# EAGLE board pidcontroller-less-pins-no-contrast (EAGLE 6.4)
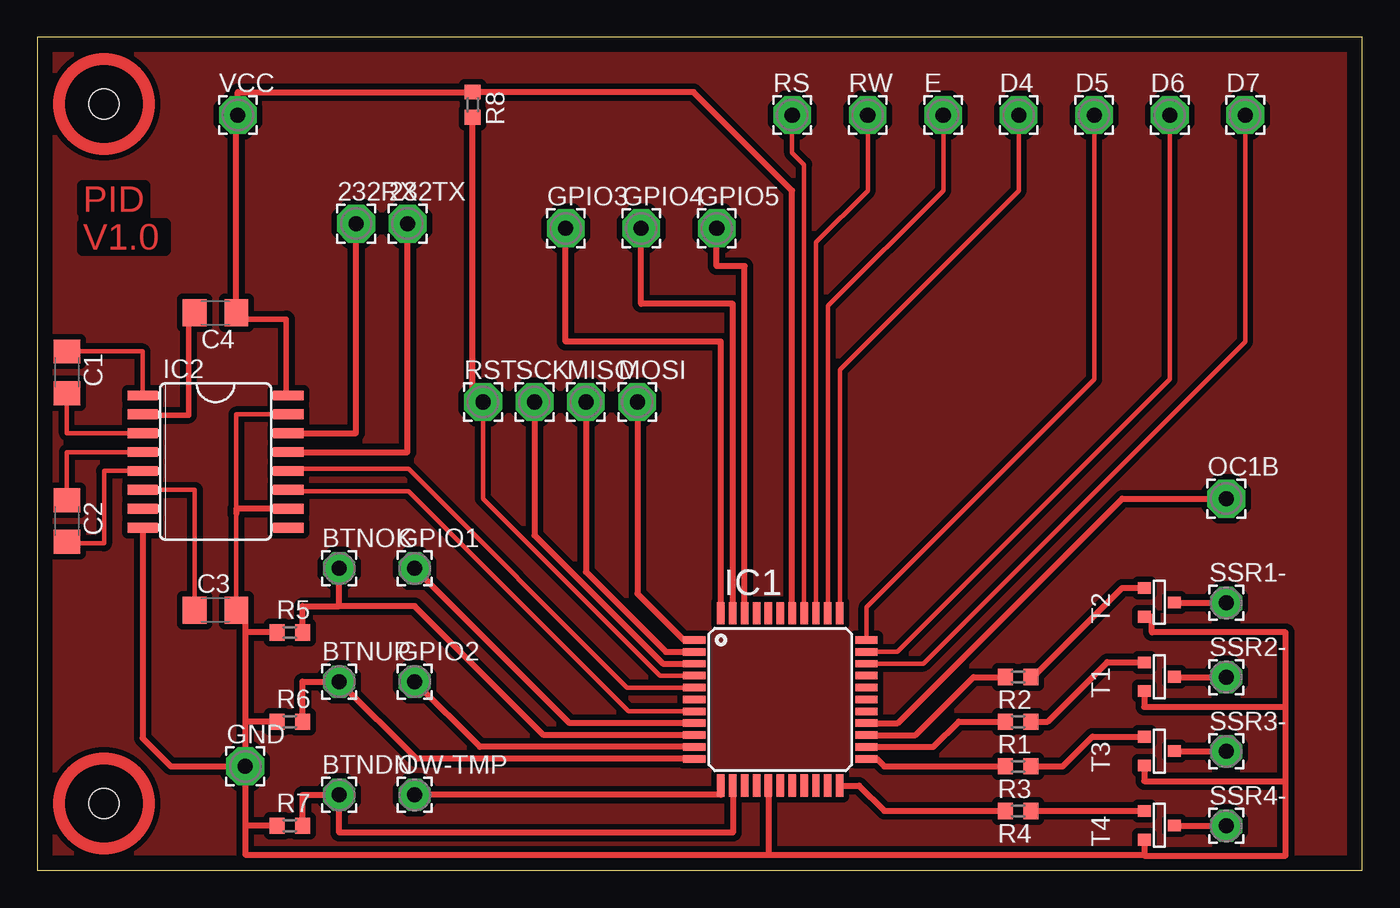
[diagram p0: board, top side]

Size 89.16 x 56.04 mm. Coordinates in mm from the lower left corner, seen from the top.
Outline: 0,0 89.16,0 89.16,56.04 0,56.04 0,0
Copper layers (1*16): Top 0.035mm / dielectric 1.5mm / Bottom 0.035mm
Design rules "default": minimum track width 10mil, minimum drill 24mil, track to track 8mil, track to pad 8mil, pad to pad 8mil, via to via 8mil, smd to smd 8mil, copper to edge 40mil, drill to drill 8mil, minimum pad ring 10mil, minimum via ring 8mil, stop-mask expansion 4mil, vias tented up to drill 0mil, thermal gap 10mil
Net classes: 0 default: width 0.381 mm, drill 0.762 mm, clearance 0.381 mm
Holes 2 mm at 4.5,4.5 4.5,51.54

## Footprints (pad centres in the part's own frame; a part is rotated, then mirrored left to right if it is on the bottom)
2,54/1,0 = drill 1.016 pad 2.54 octagon: 1 0,0
2,15/1,0 = drill 1.016 pad 2.159 octagon: 1 0,0
C1206 = smd 1.6 x 1.8: 1 -1.4,0; 2 1.4,0
TQFP44 = smd 1.5 x 0.5: 1 -5.8,4; 2 -5.8,3.2; 3 -5.8,2.4; 4 -5.8,1.6; 5 -5.8,0.8; 6 -5.8,0; 7 -5.8,-0.8; 8 -5.8,-1.6; 9 -5.8,-2.4; 10 -5.8,-3.2; 11 -5.8,-4; 23 5.8,-4; 24 5.8,-3.2; 25 5.8,-2.4; 26 5.8,-1.6; 27 5.8,-0.8; 28 5.8,0; 29 5.8,0.8; 30 5.8,1.6; 31 5.8,2.4; 32 5.8,3.2; 33 5.8,4 | smd 0.5 x 1.5: 12 -4,-5.8; 13 -3.2,-5.8; 14 -2.4,-5.8; 15 -1.6,-5.8; 16 -0.8,-5.8; 17 0,-5.8; 18 0.8,-5.8; 19 1.6,-5.8; 20 2.4,-5.8; 21 3.2,-5.8; 22 4,-5.8; 34 4,5.8; 35 3.2,5.8; 36 2.4,5.8; 37 1.6,5.8; 38 0.8,5.8; 39 0,5.8; 40 -0.8,5.8; 41 -1.6,5.8; 42 -2.4,5.8; 43 -3.2,5.8; 44 -4,5.8
SO16L = smd 0.66 x 2.032: 1 -4.445,-4.902; 2 -3.175,-4.902; 3 -1.905,-4.902; 4 -0.635,-4.902; 5 0.635,-4.902; 6 1.905,-4.902; 7 3.175,-4.902; 8 4.445,-4.902; 9 4.445,4.902; 10 3.175,4.902; 11 1.905,4.902; 12 0.635,4.902; 13 -0.635,4.902; 14 -1.905,4.902; 15 -3.175,4.902; 16 -4.445,4.902
R0603 = smd 1 x 1.1: 1 -0.85,0; 2 0.85,0
SOT-23 = smd 0.787 x 0.889: 1 0.025,-1.016; 2 -0.94,1.016; 3 0.991,1.016

## Placement (x,y rotation side)
232RX  [2,54/1,0]  21.46,43.5 0 top
232TX  [2,54/1,0]  24.92,43.5 0 top
BTNDN  [2,15/1,0]  20.32,5.08 0 top
BTNOK  [2,15/1,0]  20.32,20.32 0 top
BTNUP  [2,15/1,0]  20.32,12.7 0 top
C1  [C1206]  2,33.5 270 top
C2  [C1206]  2,23.5 270 top
C3  [C1206]  12,17.5 0 top
C4  [C1206]  12,37.5 180 top
D4  [2,54/1,0]  66.04,50.8 0 top
D5  [2,54/1,0]  71.12,50.8 0 top
D6  [2,54/1,0]  76.2,50.8 0 top
D7  [2,54/1,0]  81.28,50.8 0 top
E  [2,54/1,0]  60.96,50.8 0 top
GND  [2,54/1,0]  14,7 0 top
GPIO1  [2,15/1,0]  25.4,20.32 0 top
GPIO2  [2,15/1,0]  25.4,12.7 0 top
GPIO3  [2,54/1,0]  35.56,43.18 0 top
GPIO4  [2,54/1,0]  40.64,43.18 0 top
GPIO5  [2,54/1,0]  45.72,43.18 0 top
IC1  MEGA8515-A  [TQFP44]  50,11.5 0 top
IC2  MAX3232CWE  [SO16L]  12,27.5 270 top
MISO  [2,54/1,0]  36.92,31.5 0 top
MOSI  [2,54/1,0]  40.38,31.5 0 top
OC1B  [2,54/1,0]  80,25 0 top
OW-TMP  [2,15/1,0]  25.4,5.08 0 top
R1  [R0603]  66,10 180 top
R2  [R0603]  66,13 180 top
R3  [R0603]  66,7 180 top
R4  [R0603]  66,4 180 top
R5  [R0603]  17,16 0 top
R6  [R0603]  17,10 0 top
R7  [R0603]  17,3 0 top
R8  [R0603]  29.3,51.5 270 top
RS  [2,54/1,0]  50.8,50.8 0 top
RST  [2,54/1,0]  30,31.5 0 top
RW  [2,54/1,0]  55.88,50.8 0 top
SCK  [2,54/1,0]  33.46,31.5 0 top
SSR1-  [2,15/1,0]  80,18 0 top
SSR2-  [2,15/1,0]  80,13 0 top
SSR3-  [2,15/1,0]  80,8 0 top
SSR4-  [2,15/1,0]  80,3 0 top
T1  [SOT-23]  75.5,13 90 top
T2  [SOT-23]  75.5,18 90 top
T3  [SOT-23]  75.5,8 90 top
T4  [SOT-23]  75.5,3 90 top
VCC  [2,54/1,0]  13.5,50.8 0 top

## Library data of the parts
232RX 232TX BTNDN BTNOK BTNUP D4-D7 E GND GPIO1-GPIO5 MISO MOSI OC1B OW-TMP RS RST RW SCK SSR1- SSR2- SSR3- SSR4- VCC = wirepad
C1-C4 R1-R8 = resistor
IC1 = atmel; MPN: ATMEGA8515-16AU; OC_FARNELL: 9171410; OC_NEWARK: 01M6904
IC2 = maxim; MF: MAXIM; MPN: MAX3232CWE+; OC_FARNELL: 9725504; OC_NEWARK: 68K4630
T1-T4 = zetex; MPN: DSS20201L-7; OC_FARNELL: 1710688; OC_NEWARK: 25R4555

## Nets
1: D6.1 IC1.32
GND: C3.2 GND.1 IC1.16 IC2.8 IC2.10 IC2.15 R5.1 R6.1 R7.1 T1.2 T2.2 T3.2 T4.2
N$1: IC1.3 SCK.1
N$2: R1.1 T1.3
N$3: R2.1 T2.3
N$4: IC1.24 R1.2
N$5: C2.2 IC2.5
N$6: C2.1 IC2.4
N$7: C1.2 IC2.3
N$8: C1.1 IC2.1
N$9: C4.2 IC2.2
N$10: IC1.25 R2.2
N$11: C3.1 IC2.6
N$12: IC1.7 IC2.11
N$13: IC1.5 IC2.12
N$14: IC1.2 MISO.1
N$15: IC1.1 MOSI.1
N$16: IC1.37 RS.1
N$17: IC1.36 RW.1
N$18: E.1 IC1.35
N$19: D4.1 IC1.34
N$20: D5.1 IC1.33
N$21: GPIO5.1 IC1.42
N$22: D7.1 IC1.31
N$23: SSR2-.1 T1.1
N$24: SSR1-.1 T2.1
N$25: 232RX.1 IC2.14
N$26: 232TX.1 IC2.13
N$28: SSR3-.1 T3.1
N$29: SSR4-.1 T4.1
N$30: R3.1 T3.3
N$31: R4.1 T4.3
N$32: IC1.23 R3.2
N$33: IC1.22 R4.2
N$34: GPIO4.1 IC1.43
N$35: GPIO3.1 IC1.44
N$36: IC1.26 OC1B.1
PD2: GPIO1.1 IC1.8
PD3: BTNOK.1 IC1.9 R5.2
PD4: GPIO2.1 IC1.10
PD5: BTNUP.1 IC1.11 R6.2
PD6: IC1.12 OW-TMP.1
PD7: BTNDN.1 IC1.13 R7.2
RESET: IC1.4 R8.2 RST.1
VCC: C4.1 IC1.38 IC2.16 R8.1 VCC.1

## Tracks (layer width: path | path; a pad name or v marks a point on that pad's centre or on a via)
1
  Top 0.305: IC1.32 57.88,14.7 76.2,33.02 D6.1
GND
  Top 0.305: IC2.15 13.4,30.68 13.4,24 C3.2
  Top 0.406: IC1.16 49.2,1.06 | T4.2 74.48,1.06 | 84,6 84,1 74.48,1 74.48,1.06 | 84,6 84,11 | 84,11 84,16 75,16 75,17.06 T2.2 | T3.2 74.48,6 84,6 | T1.2 74.48,11 84,11 | C3.2 14,17.5 14,16 | 14,16 14,10 | 14,10 GND.1 | 49.2,1.06 74.48,1.06 | IC2.8 7.1,8.9 9,7 GND.1 | IC2.10 13.4,24.32 13.4,24 | GND.1 14,3 | 14,3 14,1.06 49.2,1.06 | R5.1 14,16 | R6.1 14,10 | R7.1 14,3
N$1
  Top 0.406: SCK.1 33.46,22.54 42.1,13.9 IC1.3
N$2
  Top 0.406: R1.1 68,10 72,14 T1.3
N$3
  Top 0.406: R2.1 67,13 73,19 T2.3
N$4
  Top 0.406: IC1.24 60.3,8.3 62,10 R1.2
N$5
  Top 0.305: IC2.5 4.5,26.86 4.5,22 2,22 C2.2
  Top 0.381: 2.06,21.98 C2.2
N$6
  Top 0.305: IC2.4 2,28.14 C2.1
  Top 0.381: 2.06,25.03 C2.1
N$7
  Top 0.305: IC2.3 2,29.41 C1.2
N$8
  Top 0.305: IC2.1 7.1,34.9 C1.1
N$9
  Top 0.381: C4.2 10.19,37.22 10.19,30.62 7.14,30.62 IC2.2
N$10
  Top 0.406: IC1.25 59.1,9.1 63,13 R2.2
N$11
  Top 0.305: IC2.6 10.6,25.59 C3.1
N$12
  Top 0.305: IC1.7 39.8,10.7 25,25.5 17,25.5 IC2.11
N$13
  Top 0.305: IC1.5 39.7,12.3 25,27 17.04,27 IC2.12
N$14
  Top 0.406: MISO.1 36.92,20.08 42.3,14.7 IC1.2
N$15
  Top 0.406: MOSI.1 40.38,18.62 43.5,15.5 IC1.1
N$16
  Top 0.305: IC1.37 51.6,47.46 50.8,48.26 RS.1
N$17
  Top 0.305: IC1.36 52.4,42.24 55.88,45.72 RW.1
N$18
  Top 0.305: IC1.35 53.2,37.96 60.96,45.72 E.1
N$19
  Top 0.305: IC1.34 54,33.68 66.04,45.72 D4.1
N$20
  Top 0.305: IC1.33 55.8,17.7 71.12,33.02 D5.1
N$21
  Top 0.406: IC1.42 47.6,40.64 45.72,40.64 GPIO5.1
N$22
  Top 0.305: IC1.31 59.62,13.9 81.28,35.56 D7.1
N$23
  Top 0.406: T1.1 76.52,13 SSR2-.1
N$24
  Top 0.406: T2.1 76.52,18 SSR1-.1
N$25
  Top 0.406: IC2.14 21.46,29.41 232RX.1
N$26
  Top 0.406: IC2.13 24.92,28.14 232TX.1
N$27
  pour Top: 0,56 0,0 89.54,0 89.54,56
N$28
  Top 0.406: T3.1 76.52,8 SSR3-.1
N$29
  Top 0.406: T4.1 76.52,3 SSR4-.1
N$30
  Top 0.406: R3.1 69,7 71,9 T3.3
N$31
  Top 0.406: R4.1 T4.3
N$32
  Top 0.406: IC1.23 56.5,7.5 57,7 R3.2
N$33
  Top 0.406: IC1.22 55.3,5.7 57,4 R4.2
N$34
  Top 0.406: IC1.43 46.8,38.1 40.64,38.1 GPIO4.1
N$35
  Top 0.406: IC1.44 46,35.56 35.56,35.56 GPIO3.1
N$36
  Top 0.406: IC1.26 57.9,9.9 73,25 OC1B.1
PD2
  Top 0.406: IC1.8 35.82,9.9 GPIO1.1
PD3
  Top 0.406: IC1.9 34.08,9.1 25.4,17.78 20.32,17.78 | 20.32,17.78 BTNOK.1 | R5.2 17.85,17.78 20.32,17.78
PD4
  Top 0.406: IC1.10 29.8,8.3 GPIO2.1
PD5
  Top 0.406: IC1.11 25.52,7.5 BTNUP.1 17.85,12.7 R6.2
PD6
  Top 0.406: IC1.12 46,5.08 OW-TMP.1
PD7
  Top 0.406: IC1.13 46.8,2.54 20.32,2.54 BTNDN.1 17.85,5.08 R7.2
RESET
  Top 0.305: IC1.4 41.9,13.1 30,25 RST.1
  Top 0.406: RST.1 29.3,31.5 R8.2
VCC
  Top 0.381: 13.75,37.22 C4.1 13.72,37.08 16.76,37.08 16.76,32 IC2.16
  Top 0.406: C4.1 13.4,50.8 VCC.1 13.5,52.35 R8.1 44.17,52.35 50.8,45.72 IC1.38
(copper drawn outside any net)
  shapes: Top circle x2

## Text on the board
Top: PID | V1.0